# Altium PCB L50T-TEST.PcbDoc (part 1 of 3)
Units mil, origin at the board's own origin, x right, y up, seen from the top; angles counter-clockwise.
Board outline 6860.42 x 9197.04 mil, 2 copper layers (Top Layer, Bottom Layer); 174 components, 146 nets, 565 pads, 293 vias.
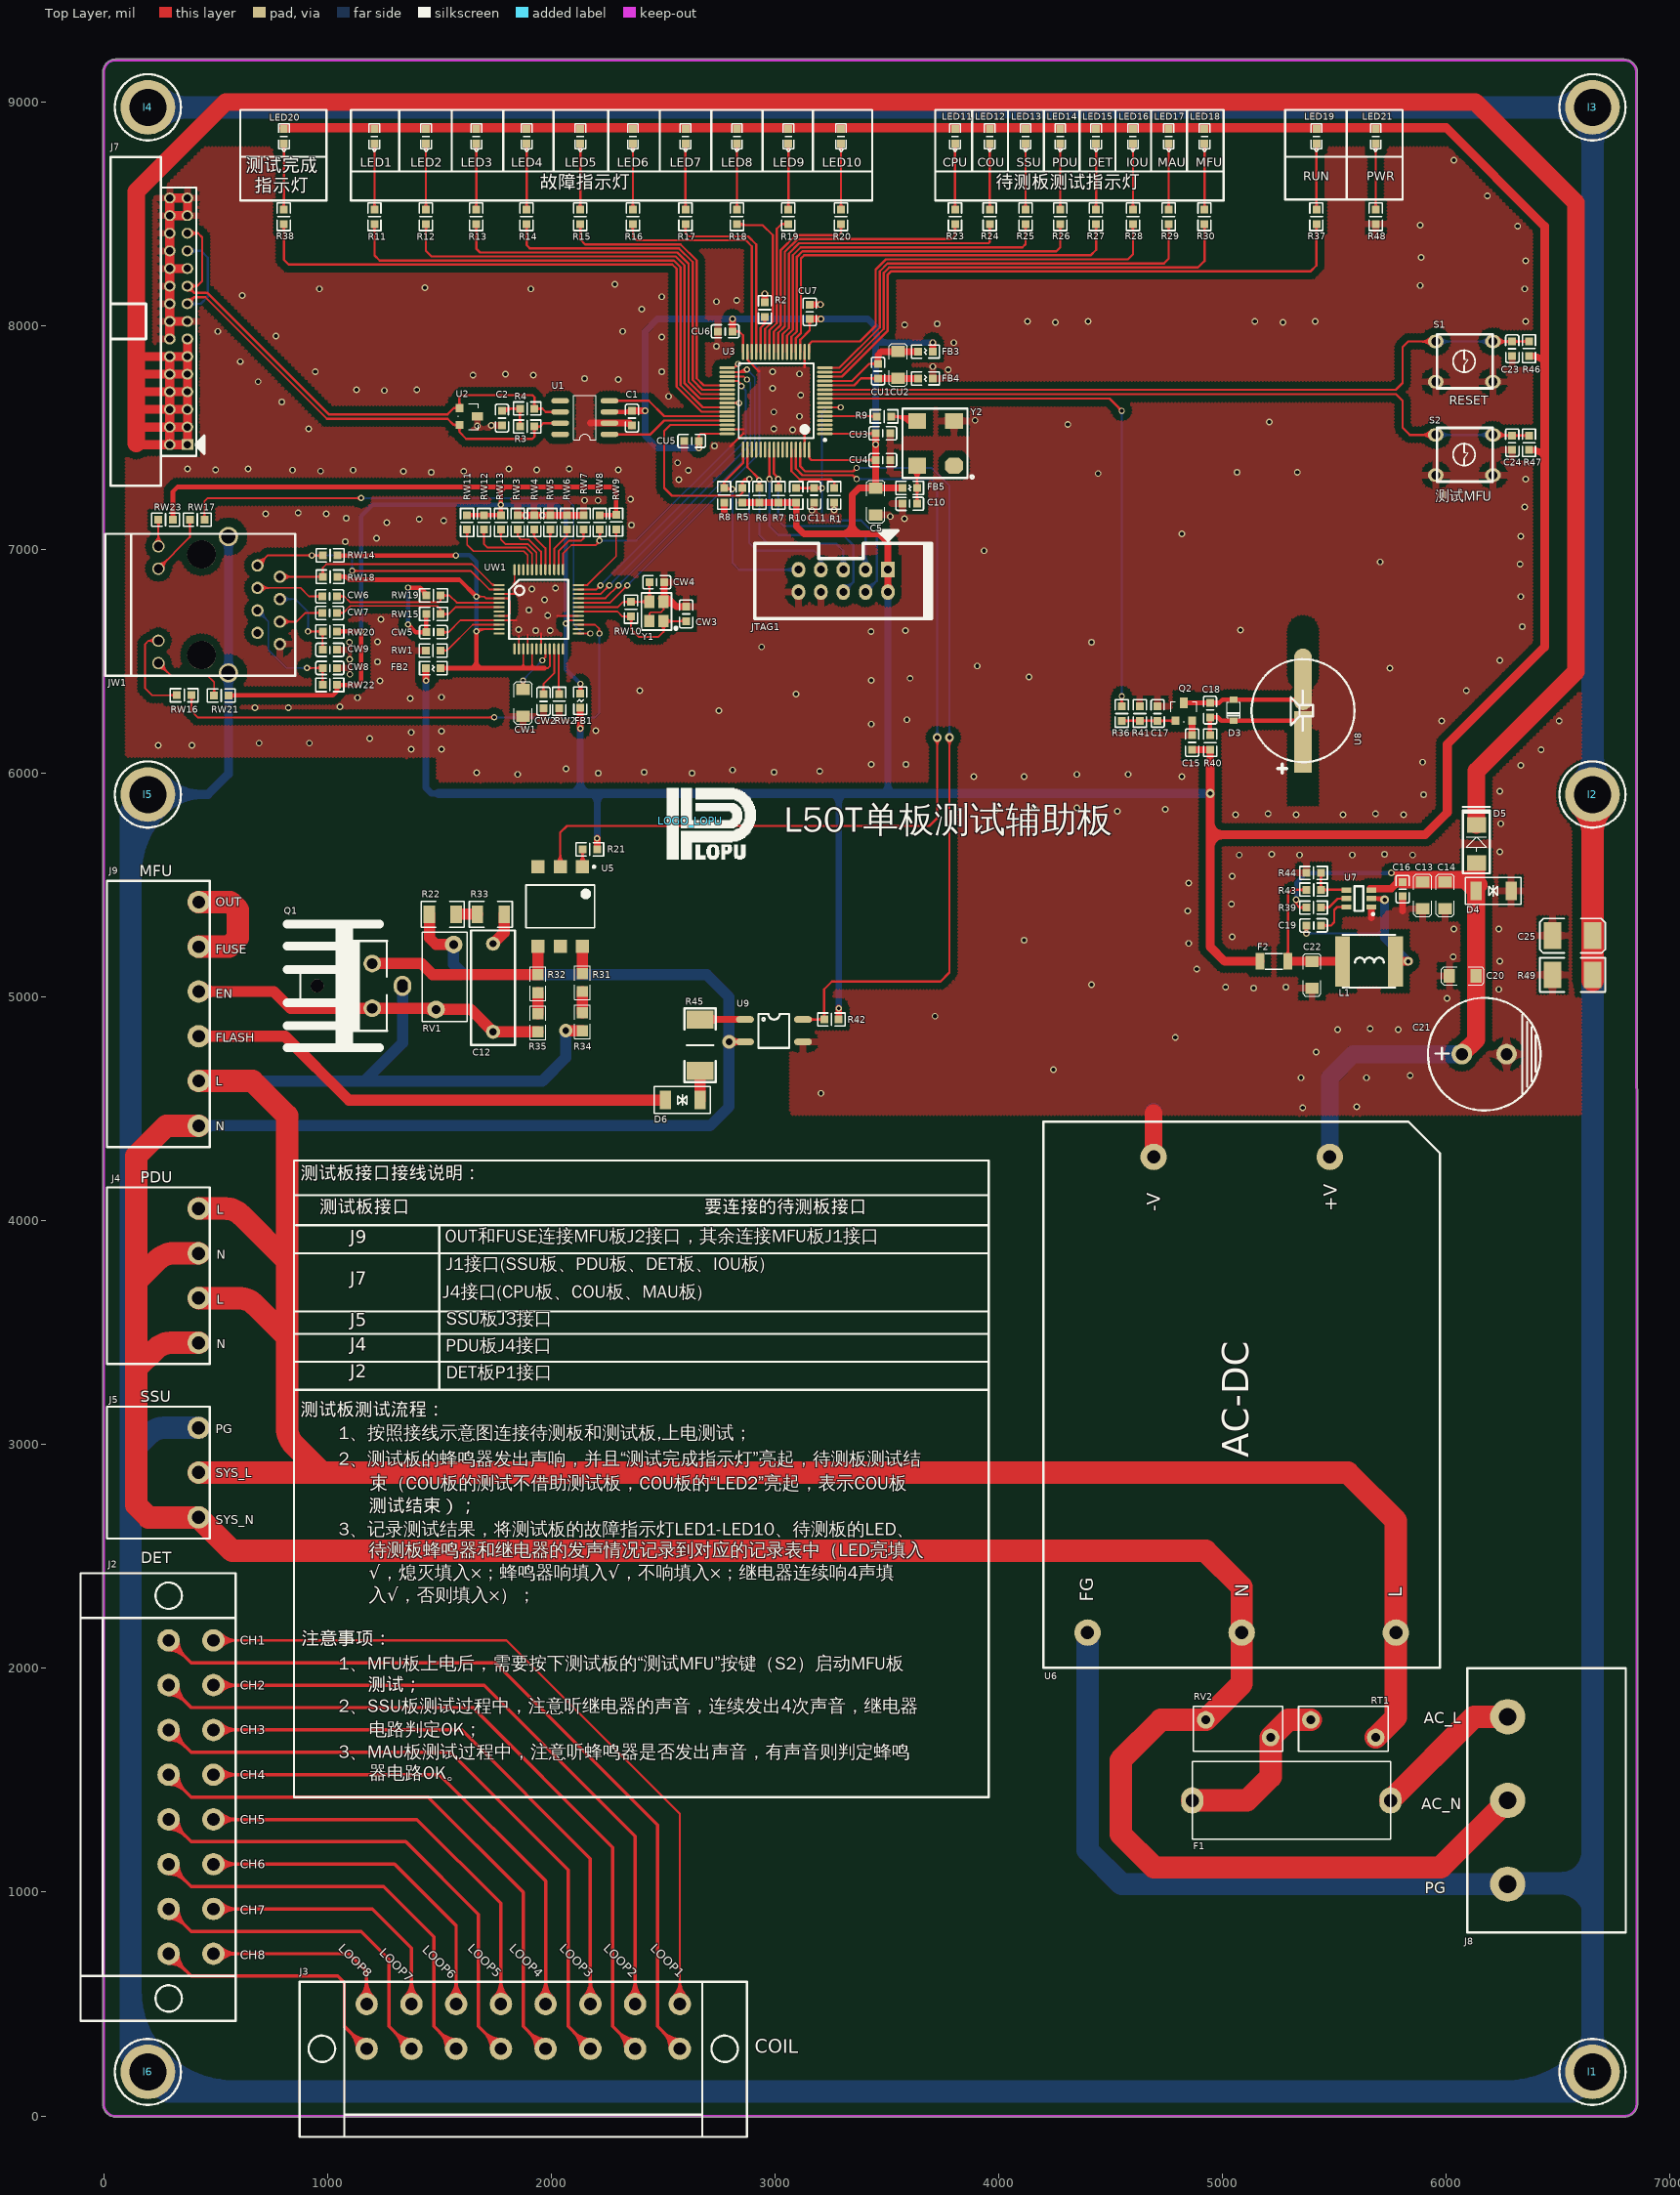
[diagram p0: Top Layer view]
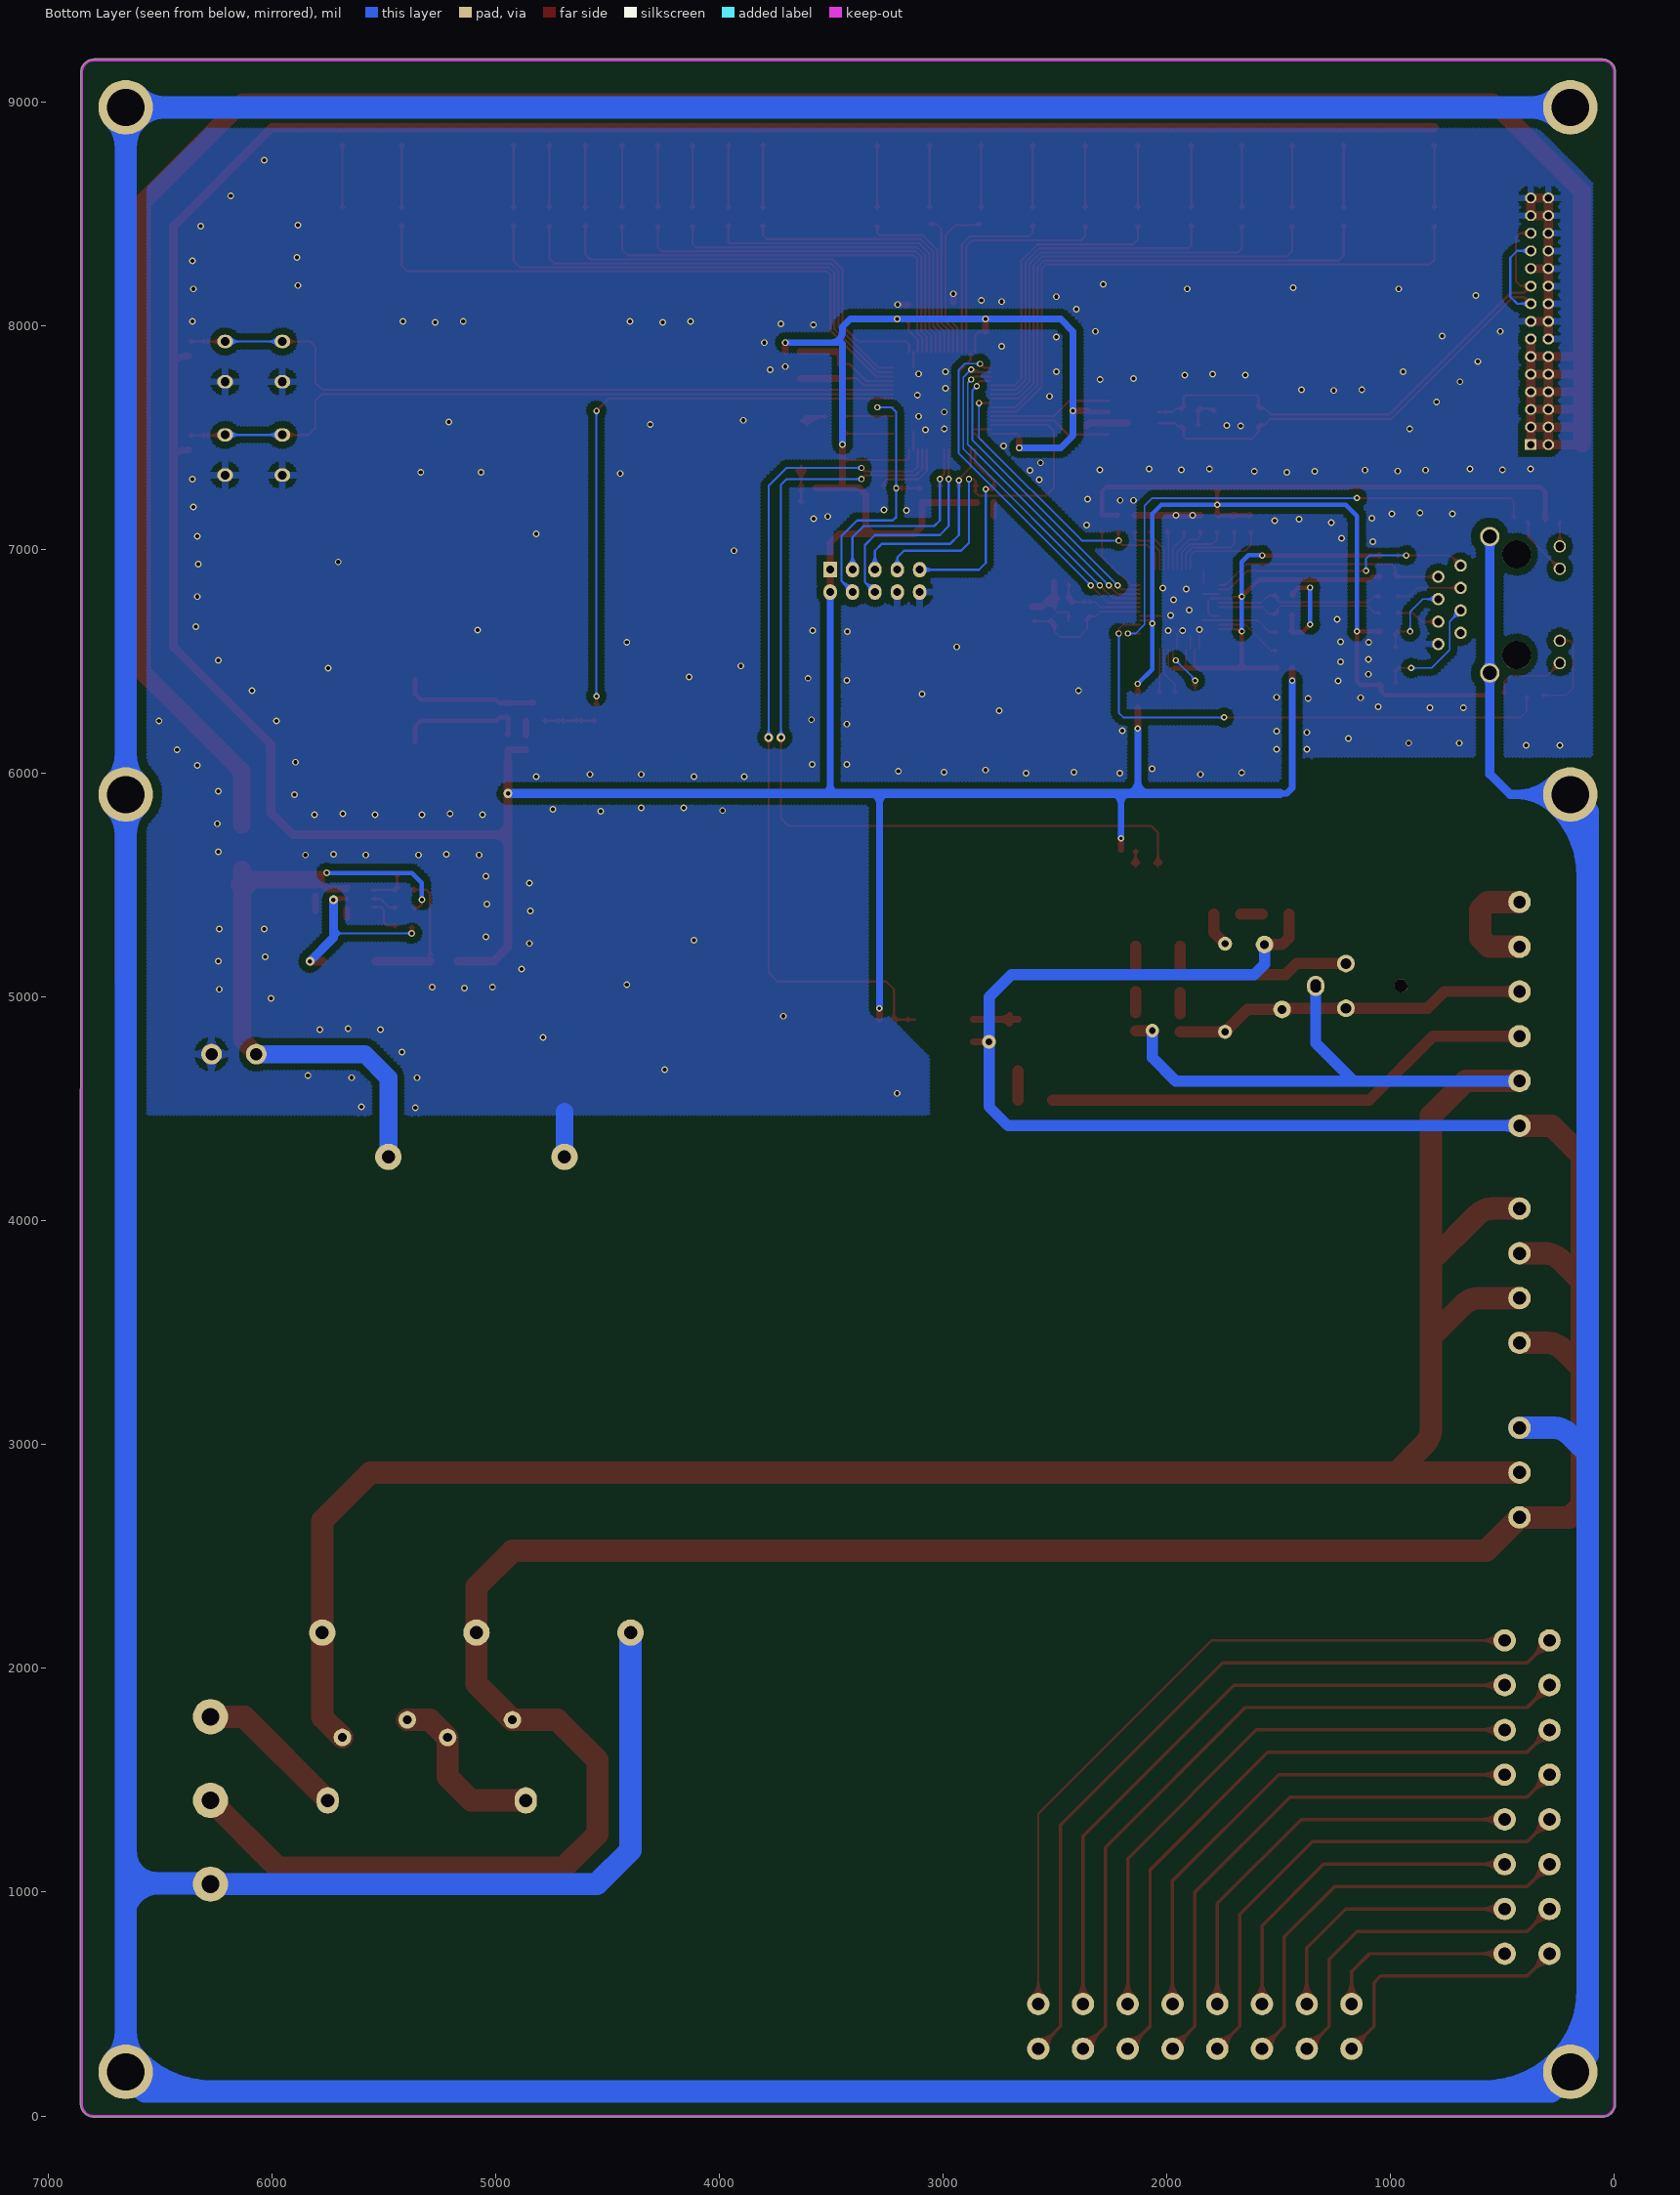
[diagram p1: Bottom Layer view, seen from below]

## Layer stack, top to bottom
Top Layer: signal copper 1.4
Dielectric: dielectric 12.6, FR-4, Dk 4.8
Bottom Layer: signal copper 1.4

## Board outline
-5.02,53.15 cw(c0,53.15) -5.01,53.18 -5.02,53.15 ccw(c53.15,53.15) 53.15,-5.02 6797.24,-5.02 ccw(c6797.24,0) 6798.51,-4.85 ccw(c6797.24,53.3) 6855.22,48.65 ccw(c6850.39,50) 6855.41,50 ccw(c6850.39,50) 6855.41,50 6855.41,53.17 6855.41,53.34 cw(c6850.39,53.3) 6855.41,53.3 cw(c6797.24,53.3) 6855.41,53.17 6855.41,53.34 6855.01,9129.96 ccw(c6794,9131) 6855.02,9131 ccw(c6794,9131) 6795.09,9192.02 ccw(c6795,9187.01) 6795,9192.02 55,9192.02 ccw(c55,9187.01) 54.15,9191.95 ccw(c53.3,9187.01) 53.3,9192.02 ccw(c53.3,9133.86) -4.52,9140.17 ccw(c0,9138) -5.01,9138

## Design rules (kind name [scope] priority, off if disabled: settings)
Clearance Clearance_220 [InNetClass('220') vs InNetClass('220')] p1: gap=100
Clearance Clearance_pg&dgnd [InNet('PG') vs InNet('DGND')] p2: gap=40
Clearance Clearance_POLY [InPolygon] p3: gap=30
Clearance Clearance_MCU [InComponent('U3')] p4: gap=7
Clearance [All] p5: gap=8
ComponentClearance [All] p1 off: gap=10 collisioncheckmode=3 verticalgap=10 showdistances=FALSE
DiffPairsRouting [All] p1: maxlimit=10 minlimit=10 mostfreqgap=10 maxuncoupledlength=500
Height [All] p1: minheight=0 maxheight=2000 prefheight=500
HoleSize [All] p1: absolutevalues=TRUE maxlimit=236.22 minlimit=1 maxpercent=80.000 minpercent=20.000
PolygonConnect PolygonConnect_VIA [IsVia] p1: connectstyle=Direct reliefconductorwidth=10 reliefentries=4 polygonreliefangle="90 Angle"
PolygonConnect [All] p2: connectstyle=Relief reliefconductorwidth=30 reliefentries=4 polygonreliefangle="90 Angle"
RoutingVias [All] p1: holewidth=18 width=30 viastyle="Through Hole" minholewidth=10 minwidth=10 maxholewidth=50 maxwidth=100
SilkToSilkClearance [All] p1 off: silktosilkclearance=10
SilkscreenOverComponentPads SilkToSolderMaskClearance [IsPad] p1: minsilkscreentomaskgap=10
SolderMaskExpansion [All] p1: expansion=4
Width [All] p1: maxlimit=100 minlimit=5 preferedwidth=10
22 further rules are at their usual default settings.

## Classes and differential pairs
differential pair DifferentialPair_RD: +RD+ -RD-
differential pair DifferentialPair_TD: +TD+ -TD-
differential pair DifferentialPair_CAN: +CAN1_H -CAN1_L
differential pair DifferentialPair_STM32-CAN: +CAN_RX -CAN_TX

## Components (designator, comment, footprint, x,y, rotation, side; value= is the part's Value field where it differs from the comment)
C1 "0603-50V-0.1UF-X7R-K" 0603C 2360,7620 r270 top
C2 "DNP" 0603C 1780,7555 r90 top
C5 "1206-16V-10UF-X5R-K" 1206C 3450,7155 r90 top
C10 "0603-50V-0.1UF-X7R-K" 0603c 3635,7205 r180 top
C11 "0603-50V-0.1UF-X7R-K" 0603C 3175,7210 r90 top
C12 "B32671L1222J289" CAP-10-5 1740,5238.7 r270 top
C13 "1206-16V-10UF-X5R-K" 1206C 5895,5395 r90 top locked
C14 "1206-16V-10UF-X5R-K" 1206C 5995,5395 r90 top locked
C15 "0603-50V-0.1UF-X7R-K" 0603C 4864.94,6105 r90 top locked
C16 "0603-50V-0.1UF-X7R-K" 0603C 5805,5515 r270 top locked
C17 "0603-50V-0.1UF-X7R-K" 0603C 4709.94,6300 r270 top locked
C18 "0603-50V-0.1UF-X7R-K" 0603C 4944.94,6250 r90 top locked
C19 "0603-50V-0.1UF-X7R-K" 0603C 5375,5320 r0 top locked
C20 "1206-16V-10UF-X5R-K" 1206C 6134.09,5095 r180 top
C21 "35YXF220MEFC10X125" RB.2/.4 6070,4745 r180 top
C22 "1206-10V-47UF-Y5V-M" 1206C 5400,5040 r90 top locked
C23 "0603-50V-0.1UF-X7R-K" 0603C 6295,7930 r270 top
C24 "0603-50V-0.1UF-X7R-K" 0603C 6295,7510 r270 top
C25 "1812-1NF/2KV" 1812C 6655,5275 r180 top locked
CU1 "0603-50V-0.01UF-X7R-K" 0603C 3460,7830 r270 top locked
CU2 "1206-16V-10UF-X5R-K" 1206C 3550,7885 r270 top locked
CU3 "0603-50V-0.1UF-X7R-K" 0603C 3515,7520 r180 top
CU4 "0603-50V-0.1UF-X7R-K" 0603C 3515,7400 r180 top
CU5 "0603-50V-0.1UF-X7R-K" 0603C 2595,7485 r0 top
CU6 "0603-50V-0.1UF-X7R-K" 0603C 2745,7975 r0 top
CU7 "0603-50V-0.1UF-X7R-K" 0603C 3155,8095 r270 top
CW1 "1206-16V-4.7UF-X5R-K" 1206C 1874,6375 r270 top locked
CW2 "0603-50V-0.01uF-X7R-K" 0603C 1965,6355 r270 top locked
CW3 "0603-50V-18pF-C0G-K" 0603C 2603,6745 r270 top locked
CW4 "0603-50V-18pF-C0G-K" 0603C 2504,6854 r180 top locked
CW5 "10n/0603" 0603C 1441,6631 r0 top locked
CW6 "0603-50V-6.8nF-X7R-K" 0603C 977,6791 r0 top
CW7 "0603-50V-6.8nF-X7R-K" 0603C 977,6717 r0 top
CW8 "0603-10NF" 0603C 978,6471 r0 top
CW9 "0603-22NF" 0603C 978,6552 r0 top
D3 "1N4148" SOD-323 5050,6235 r90 top
D4 "SMBJ15CA" SMB-TVS 6290,5475 r180 top locked
D5 "SS14" SMA 6135,5685 r90 top locked
D6 "SMBJ130CA" SMB-TVS 2665.91,4540 r180 top locked
F1 "T2AH250VP" FUSE-BF013 5750.83,1410 r180 top
F2 "贴片1206/nSMD035（台湾陆海）" 1206F 5230,5160 r180 top
FB1 "0603 31@100MHz" 0603L#1 2130,6325 r90 top
FB2 "0603 31@100MHz" 0603L#2 1440,6470 r0 top
FB3 "0603 31@100MHz" 0603L#2 3705,7885 r180 top locked
FB4 "0603 31@100MHz" 0603L#2 3705,7765 r180 top locked
FB5 "0603 31@100MHz" 0603L#2 3635,7275 r180 top
I1 "PCB-M3" PADS_M3 6653.54,196.85 r0 top locked
I2 "PCB-M3" PADS_M3 6653.54,5905.51 r0 top locked
I3 "PCB-M3" PADS_M3 6653.54,8976.38 r0 top locked
I4 "PCB-M3" PADS_M3 196.85,8976.38 r0 top locked
I5 "PCB-M3" PADS_M3 196.85,5905.51 r0 top locked
I6 "PCB-M3" PADS_M3 196.85,196.85 r0 top locked
J2 "Header 8X2H" KF2EDGKRHM-5.08-8 490,725 r90 top
J3 "Header 8X2H" KF2EDGKRHM-5.08-8 2575,500 r180 top
J4 "Header 4H" CON-4-5.08 424,3455 r90 top locked
J5 "Header 3" CON-3-5.08 424,2675 r90 top locked
J7 "Header15x2" IDC-30-2.0-C 31.22,7335.71 r90 top locked
J8 "Header 3" CON-3-9.5 6093.9,2000.55 r270 top
J9 "Header 6" CON-6-5.08 424,4425 r90 top locked
JTAG1 "Header 5X2" IDC-10-B 3505,6910 r180 top
JW1 "HY911105A" HY911105A 121.54,6753.59 r90 top
L1 "贴片6045功率电感 3.3uH 5A" L-6045 5655,5160 r270 top locked
LED1 "Red" LED-0603 1210,8880 r270 top locked
LED2 "Red" LED-0603 1440,8880 r270 top locked
LED3 "Red" LED-0603 1665,8880 r270 top locked
LED4 "Red" LED-0603 1890,8880 r270 top locked
LED5 "Red" LED-0603 2130,8880 r270 top locked
LED6 "Red" LED-0603 2365,8880 r270 top locked
LED7 "Red" LED-0603 2600,8880 r270 top locked
LED8 "Red" LED-0603 2830,8880 r270 top locked
LED9 "Red" LED-0603 3060,8880 r270 top locked
LED10 "Red" LED-0603 3295,8880 r270 top locked
LED11 "Green" LED-0603 3805,8880 r270 top locked
LED12 "Green" LED-0603 3960,8880 r270 top locked
LED13 "Green" LED-0603 4120,8880 r270 top locked
LED14 "Green" LED-0603 4275,8880 r270 top locked
LED15 "Green" LED-0603 4435,8880 r270 top locked
LED16 "Green" LED-0603 4600,8880 r270 top locked
LED17 "Green" LED-0603 4760,8880 r270 top locked
LED18 "Green" LED-0603 4920,8880 r270 top locked
LED19 "Blue" LED-0603 5420,8880 r270 top locked
LED20 "Yellow" LED-0603 805,8880 r270 top locked
LED21 "Red" LED-0603 5685,8880 r270 top locked
LOGO_LOPU "LOPU_LOGO" LOPU_LOGO 2622,5788.47 r0 top
Q1 "BTA16-600" TO-220AB-C 1200,4950 r90 top locked
Q2 "8050" SOT-23 4864.94,6235 r180 top locked
R1 "0603-10K-1%" 0603R 3265,7275 r270 top
R2 "0603-10K-1%" 0603R 2955,8105 r270 top
R3 "DNP" 0603R 1925,7550 r180 top
R4 "DNP" 0603R 1860,7630 r0 top
R5 "0603-10K-1%" 0603R 2855,7275 r270 top
R6 "0603-10K-1%" 0603R 2930,7275 r270 top
R7 "0603-10K-1%" 0603R 3015,7275 r270 top
R8 "0603-10K-1%" 0603R 2772.72,7210 r90 top
R9 "0603-22-1%" 0603R 3455,7595 r0 top
R10 "0603-10K-1%" 0603R 3095,7275 r270 top
R11 "0603-680-1%" 0603R 1210,8455 r90 top locked
R12 "0603-680-1%" 0603R 1440,8455 r90 top locked
R13 "0603-680-1%" 0603R 1665,8455 r90 top locked
R14 "0603-680-1%" 0603R 1890,8455 r90 top locked
R15 "0603-680-1%" 0603R 2130,8455 r90 top locked
R16 "0603-680-1%" 0603R 2365,8455 r90 top locked
R17 "0603-680-1%" 0603R 2600,8455 r90 top locked
R18 "0603-680-1%" 0603R 2830,8455 r90 top locked
R19 "0603-680-1%" 0603R 3060,8455 r90 top locked
R20 "0603-680-1%" 0603R 3295,8455 r90 top locked
R21 "0603-330-1%" 0603R 2205,5660 r180 top locked
R22 "1210-25.5-1%" 1210R 1455,5370 r0 top
R23 "0603-680-1%" 0603R 3805,8455 r90 top locked
R24 "0603-680-1%" 0603R 3960,8455 r90 top locked
R25 "0603-680-1%" 0603R 4120,8455 r90 top locked
R26 "0603-680-1%" 0603R 4275,8455 r90 top locked
R27 "0603-680-1%" 0603R 4435,8455 r90 top locked
R28 "0603-680-1%" 0603R 4600,8455 r90 top locked
R29 "0603-680-1%" 0603R 4760,8455 r90 top locked
R30 "0603-680-1%" 0603R 4920,8455 r90 top locked
R31 "0805-1.2K-1%" 0805R 2140,5105 r270 top locked
R32 "0805-1.2K-1%" 0805R 1940,5100 r270 top locked
R33 "1210-25.5-1%" 1210R 1670,5370 r0 top
R34 "0805-1.2K-1%" 0805R 2140,4930 r270 top locked
R35 "0805-1.2K-1%" 0805R 1940,4925 r270 top locked
R36 "0603-4.7K-1%" 0603R 4549.94,6300 r270 top locked
R37 "0603-680-1%" 0603R 5420,8455 r90 top locked
R38 "0603-680-1%" 0603R 805,8455 r90 top locked
R39 "0603-10K-1%" 0603R 5440,5400 r180 top
R40 "0603-0-1%" 0603R 4944.94,6170 r270 top locked
R41 "0603-3.3K-1%" 0603R 4629.94,6300 r270 top locked
R42 "0603-3.3K-1%" 0603R 3285,4900 r180 top
R43 "0603-33.2K-1%" 0603R 5375,5480 r0 top locked
R44 "0603-10K-1%" 0603R 5440,5555 r180 top locked
R45 "2512-56K-5% RV" 2512R 2665,4785 r90 top locked
R46 "0603-10K-1%" 0603R 6370,7865 r90 top
R47 "0603-10K-1%" 0603R 6370,7445 r90 top
R48 "0603-680-1%" 0603R 5685,8455 r90 top locked
R49 "1808-1M-1%" 1812R 6421,5175 r270 top locked
RT1 "5D-11" 10D471K 5395,1770 r0 top
RV1 "10D471K" 10D471K 1563.74,5235 r270 top
RV2 "10D471K" 10D471K 4925,1770 r0 top
RW1 "12.4K/1%/0603" 0603R 1505,6549 r180 top locked
RW2 "10K/1%/0603" 0603R 2035,6355 r270 top locked
RW3 "10K/1%/0603" 0603R 1850,7154 r270 top locked
RW4 "10K/1%/0603" 0603R 1923.33,7154 r270 top locked
RW5 "10K/1%/0603" 0603R 1996.67,7154 r270 top locked
RW6 "10K/1%/0603" 0603R 2070,7154 r270 top locked
RW7 "10K/1%/0603" 0603R 2144,7154 r270 top locked
RW8 "10K/1%/0603" 0603R 2217,7089 r90 top locked
RW9 "10K/1%/0603" 0603R 2290,7090 r90 top
RW10 "1M/1%/0603" 0603R 2357,6766 r270 top locked
RW11 "10K/1%/0603" 0603R 1624,7089 r90 top locked
RW12 "10K/1%/0603" 0603R 1699,7089 r90 top locked
RW13 "10K/1%/0603" 0603R 1775,7089 r90 top locked
RW14 "49R9/1%/0603" 0603R 979,6974 r0 top
RW15 "82/1%/0603" 0603R 1441,6712 r0 top locked
RW16 "330 0603 1%" 0603R 327,6349 r0 top
RW17 "330 0603 1%" 0603R 385,7133 r0 top
RW18 "49R9/1%/0603" 0603R 979,6879 r0 top
RW19 "82/1%/0603" 0603R 1441,6795 r0 top locked
RW20 "0603-10-1%" 0603R 1043,6634 r180 top
RW21 "0603-680-1%" 0603R 558,6348 r180 top
RW22 "0603-10-1%" 0603R 1043,6395 r180 top
RW23 "0603-680-1%" 0603R 309,7133 r180 top
S1 "SW-PB" KEY-6*6*7 5953.27,7750 r0 top
S2 "SW-PB" KEY-6*6*7 5953.27,7332.82 r0 top
U1 "SN65HVD232" SO-8 2040,7515 r0 top
U2 "PESD5V0S2BT" SOT-23 1590,7557 r90 top
U3 "STM32F103R8T6" STM-LQFP64_N 3005,7665 r180 top locked
U5 "MOC3063S-TA1" MOC3063 2040,5405 r270 top locked
U6 "LH15-13B12" AC-DC-15W 5971.85,2002.52 r90 top
U7 "TPS563200" TSOT23-6 5610,5440 r0 top locked
U8 "BUZZER" "BUZZ-.28/.46 -SMT" 5360,6140 r90 top
U9 "TLP182(GB" SO-4-2.54 2866,4900 r0 top locked
UW1 "W5500" LQFP-48 1944.17,6733.16 r90 top locked
Y1 "25M贴片无源晶振 3225" OSC3225_4P 2502,6680 r90 top locked
Y2 "HXO-36A8.00000W" XTAL-C 3800.35,7375 r90 top

## Footprints (in the part's own frame and the unit in brackets; to place one, negate y for a bottom-side part, rotate by r counter-clockwise, add the part's x,y. Pads: shape width x height; smd on the part's side, far side on the other; paste and mask are expansions set on the pad)
10D471K [mm]
  round 2 hole 1: 1(0,0) 2(7.366,-2)
  silkscreen extent -1.4,-3.56 8.76,1.52
0603C [mil]
  rect 35x35 smd: 1(0,0) 2(65,0)
  silkscreen extent -29,-29 94,30
0603c [mil]
  rect 35x35 smd: 1(0,0) 2(65,0)
  silkscreen extent -29,-29 94,30
0603L#1 [mil]
  rect 35x35 smd: 1(-32.5,0) 2(32.5,0)
  silkscreen extent -62,-29 62,30, body extent -31,-15 31,16, height 16
0603L#2 [mil]
  rect 35x35 smd: 1(0,0) 2(65,0)
  silkscreen extent -29,-29 94,30
0603R [mil]
  rect 35x35 smd: 1(0,0) 2(65,0)
  silkscreen extent -29,-29 94,30
0805R [mil]
  rect 50x50 smd: 1(0,0) 2(80,0)
  silkscreen extent -35,-35 115,35
1206C [mil]
  rect 50x60 smd: 1(0,0) 2(120,0)
  silkscreen extent -35,-40 155,40
1206F [mm] "Chip Capacitor, 2-Leads, Body 3.25x1.65mm, IPC Medium Density"
  rect 1x1.85 smd: 1(-1.6,0) 2(1.6,0)
  silkscreen extent -1.02,-0.89 1.02,0.89, body extent -1.6,-0.83 1.6,0.83, height 1.43
1210R [mil]
  rect 52x80 smd: 1(0,0) 2(120,0)
  silkscreen extent -36,-58 156,58
1812C [mm]
  rect 2x3 smd: 1(0,0) 2(4.572,0)
  silkscreen extent -1.42,-1.93 5.99,1.97
1812R [mm]
  rect 3x2 smd: 1(1.905,5.944) 2(1.905,1.372)
  silkscreen extent -0.03,-0.05 3.87,7.37
2512R [mil]
  rect 80x120 smd: 1(-115,0) 2(115,0)
  silkscreen extent -165,-70 165,70, body extent -126,-63 126,63, height 24
AC-DC-15W [mm]
  round 3 hole 1.5: 1(4,40) 2(4,22.5) 3(4,5) 4(58,32.5) 8(58,12.5)
  silkscreen extent 0,0 62,45
"BUZZ-.28/.46 -SMT" [mil]
  rect 275.59x80 smd: 1(0,0)
  oval 275.59x80 smd: 2(280,0)
  silkscreen extent -139,-230 370,230
CAP-10-5 [mm]
  round 1.6 hole 0.8: 1(0,0) 2(10,0)
  silkscreen extent -1.5,-2.5 11.5,2.5
CON-3-5.08 [mil]
  round 100 hole 59: 1(0,0) 2(200,0) 3(400,0)
  silkscreen extent -95,-50 495,410
CON-3-9.5 [mm] "栅栏式接线端子"
  round 4 hole 2: 1(5.5,4.6) 2(15,4.6) 3(24.5,4.6)
  silkscreen extent 0,0 30,18
CON-4-5.08 [mil]
  round 100 hole 59: 1(0,0) 2(200,0) 3(400,0) 4(600,0)
  silkscreen extent -95,-50 695,410
CON-6-5.08 [mil]
  round 100 hole 56: 1(0,0) 2(200,0) 3(400,0) 4(600,0) 5(800,0) 6(1000,0)
  silkscreen extent -95,-50 1095,410
FUSE-BF013 [mm]
  oval 2.5x3 hole 1.5: 1(0,0) 2(22.5,0)
  silkscreen extent 0,-4.4 22.5,4.4
HY911105A [mm]
  round 3.25 hole 3.25 unplated: 0(-5.715,-8.013) 0(5.715,-8.013)
  round 1.4 hole 0.89: 1(4.45,-14.363) 2(3.18,-16.903) 3(1.91,-14.363) 4(0.64,-16.903) 5(-0.65,-14.363) 6(-1.92,-16.903) 7(-3.19,-14.363) 8(-4.46,-16.903)
  round 1.4 hole 1.02: 9(6.625,-3.113) 10(4.085,-3.113) 11(-4.085,-3.113) 12(-6.625,-3.113)
  round 2.2 hole 1.63: 13(-7.745,-11.063) 14(7.745,-11.063)
  silkscreen extent -8.05,-18.66 8.05,2.91, body extent -7.94,-18.49 7.94,2.91, height 13.5
IDC-10-B [mil]
  rect 60x70 hole 35: 1(0,0)
  oval 60x70 hole 35: 2(0,100) 3(100,0) 4(100,100) 5(200,0) 6(200,100) 7(300,0) 8(300,100) 9(400,0) 10(400,100)
  silkscreen extent -196,-175 596,218
IDC-30-2.0-C [mm]
  rect 1.219x1.321 hole 0.8: 1(3.38,-8.7)
  oval 1.219x1.321 hole 0.8: 2(3.38,-6.7) 3(5.38,-8.7) 4(5.38,-6.7) 5(7.38,-8.7) 6(7.38,-6.7) 7(9.38,-8.7) 8(9.38,-6.7) 9(11.38,-8.7) 10(11.38,-6.7) 11(13.38,-8.7) 12(13.38,-6.7) 13(15.38,-8.7) 14(15.38,-6.7) 15(17.38,-8.7) 16(17.38,-6.7) 17(19.38,-8.7) 18(19.38,-6.7) 19(21.38,-8.7) 20(21.38,-6.7) 21(23.38,-8.7) 22(23.38,-6.7) 23(25.38,-8.7) 24(25.38,-6.7) 25(27.38,-8.7) 26(27.38,-6.7) 27(29.38,-8.7) 28(29.38,-6.7) 29(31.38,-8.7) 30(31.38,-6.7)
  silkscreen extent -1.27,-10.6 36.03,0.02
KEY-6*6*7 [mil]
  oval 70x60 hole 40: 1(0,0) 1(255.91,0) 2(0,180) 2(255.91,180)
  silkscreen extent 5,-29 255,211
KF2EDGKRHM-5.08-8 [mil]
  round 100 hole 56: 1(0,0) 2(0,200) 3(200,0) 4(200,200) 5(400,0) 6(400,200) 7(600,0) 8(600,200) 9(800,0) 10(800,200) 11(1000,0) 12(1000,200) 13(1200,0) 14(1200,200) 15(1400,0) 16(1400,200)
  silkscreen extent -300,-100 1700,594
L-6045 [mm]
  rect 5.7x1.7 smd: 1(0,3) 2(0,-3)
  Top Layer pour cut-out: -3,-3 -3,3 3,3 3,-3
  silkscreen extent -3,-3 3,3
LED-0603 [mil]
  rect 35x35 smd: 1(0,0) 2(65,0)
  silkscreen extent -23,-24 101,24
LOPU_LOGO [mil]
  silkscreen extent -105,-170 291,146
LQFP-48 [mm]
  rect 0.254x1.27 smd: 1(2.75,4.5)
  oval 0.254x1.27 smd: 2(2.25,4.5) 3(1.75,4.5) 4(1.25,4.5) 5(0.75,4.5) 6(0.25,4.5) 7(-0.25,4.5) 8(-0.75,4.5) 9(-1.25,4.5) 10(-1.75,4.5) 11(-2.25,4.5) 12(-2.75,4.5) 25(-2.75,-4.5) 26(-2.25,-4.5) 27(-1.75,-4.5) 28(-1.25,-4.5) 29(-0.75,-4.5) 30(-0.25,-4.5) 31(0.25,-4.5) 32(0.75,-4.5) 33(1.25,-4.5) 34(1.75,-4.5) 35(2.25,-4.5) 36(2.75,-4.5)
  oval 1.27x0.254 smd: 13(-4.5,2.75) 14(-4.5,2.25) 15(-4.5,1.75) 16(-4.5,1.25) 17(-4.5,0.75) 18(-4.5,0.25) 19(-4.5,-0.25) 20(-4.5,-0.75) 21(-4.5,-1.25) 22(-4.5,-1.75) 23(-4.5,-2.25) 24(-4.5,-2.75) 37(4.5,-2.75) 38(4.5,-2.25) 39(4.5,-1.75) 40(4.5,-1.25) 41(4.5,-0.75) 42(4.5,-0.25) 43(4.5,0.25) 44(4.5,0.75) 45(4.5,1.25) 46(4.5,1.75) 47(4.5,2.25) 48(4.5,2.75)
  silkscreen extent -3.36,-3.36 3.36,3.36
MOC3063 [mm] "SOP, 6-Leads, Body 7.30x6.50mm, Pitch 2.54mm, IPC Medium Density"
  rect 1.5x1.5 smd: 1(-4.5,2.54) 2(-4.5,0) 3(-4.5,-2.54) 4(4.5,-2.54) 5(4.5,0) 6(4.5,2.54)
  silkscreen extent -4.62,-3.9 2.42,3.97, body extent -3.5,-3.9 3.5,3.9, height 2.65
OSC3225_4P [mm]
  rect 1.4x1.15 smd: 1(0,0) 2(2.2,0) 3(2.2,1.6) 4(0,1.6)
  silkscreen extent -1,-1.55 3.2,2.5, body extent -0.5,-0.45 2.7,2.05, height 0.61
PADS_M3 [mm]
  round 6.2 hole 4.22: 1(0,0)
  silkscreen extent -3.75,-3.75 3.75,3.75
RB.2/.4 [mil]
  round 92 hole 54: 1(0,0) 2(-200,0)
  silkscreen extent -352,-252 152,251, body extent -297,-197 97,197, height 791
SMA [mil]
  rect 70x85 smd: 1(-85,0) 2(85,0)
  silkscreen extent -132,-60 165,60
SMB-TVS [mm] "SMBJ*CA"
  rect 1.27x2.1 smd: 1(0,0) 2(3.96,0)
  silkscreen extent -1.14,-1.52 5.21,1.52
SO-4-2.54 [mil]
  oval 80x30 smd: 1(0,0) 2(0,-100) 3(259,-100) 4(259,0)
  silkscreen extent 60,-127 198,25
SO-8 [mil]
  oval 80x24 smd: 1(220,0) 2(220,50) 3(220,100) 4(220,150) 5(0,150) 6(0,100) 7(0,50) 8(0,0)
  silkscreen extent 60,-25 160,175
SOD-323 [mil]
  rect 28x36 smd: 1(95,0) 2(0,0)
  silkscreen extent 12,-30 82,30
SOT-23 [mil]
  rect 36x36 smd: 1(75,0) 2(0,0)
  rect 36x50 smd: 3(38,-80)
  silkscreen extent -20,-85 95,5
STM-LQFP64_N [mm] "Thin QFP, 64-Leads, Body 10x10mm, Pitch 0.5mm, IPC Medium Density"
  oval 1.8x0.3 smd: 1(-5.55,3.75) 2(-5.55,3.25) 3(-5.55,2.75) 4(-5.55,2.25) 5(-5.55,1.75) 6(-5.55,1.25) 7(-5.55,0.75) 8(-5.55,0.25) 9(-5.55,-0.25) 10(-5.55,-0.75) 11(-5.55,-1.25) 12(-5.55,-1.75) 13(-5.55,-2.25) 14(-5.55,-2.75) 15(-5.55,-3.25) 16(-5.55,-3.75) 33(5.55,-3.75) 34(5.55,-3.25) 35(5.55,-2.75) 36(5.55,-2.25) 37(5.55,-1.75) 38(5.55,-1.25) 39(5.55,-0.75) 40(5.55,-0.25) 41(5.55,0.25) 42(5.55,0.75) 43(5.55,1.25) 44(5.55,1.75) 45(5.55,2.25) 46(5.55,2.75) 47(5.55,3.25) 48(5.55,3.75)
  oval 0.3x1.8 smd: 17(-3.75,-5.55) 18(-3.25,-5.55) 19(-2.75,-5.55) 20(-2.25,-5.55) 21(-1.75,-5.55) 22(-1.25,-5.55) 23(-0.75,-5.55) 24(-0.25,-5.55) 25(0.25,-5.55) 26(0.75,-5.55) 27(1.25,-5.55) 28(1.75,-5.55) 29(2.25,-5.55) 30(2.75,-5.55) 31(3.25,-5.55) 32(3.75,-5.55) 49(3.75,5.55) 50(3.25,5.55) 51(2.75,5.55) 52(2.25,5.55) 53(1.75,5.55) 54(1.25,5.55) 55(0.75,5.55) 56(0.25,5.55) 57(-0.25,5.55) 58(-0.75,5.55) 59(-1.25,5.55) 60(-1.75,5.55) 61(-2.25,5.55) 62(-2.75,5.55) 63(-3.25,5.55) 64(-3.75,5.55)
  silkscreen extent -5.68,-4.25 4.25,4.57, body extent -5,-5 5,5, height 1.6
TO-220AB-C [mm]
  round 1.5 hole 1.5: 0(2.54,6.258)
  round 2 hole 1.2: 1(0,0) 3(5.08,0)
  oval 2.3x2 hole 1.2 slot 1.5 at 0 deg: 2(2.54,-3.429)
  silkscreen extent -4.46,-1.65 9.54,9.66
TSOT23-6 [mm]
  rect 1.1x0.6 smd: 1(1.4,-0.95) 2(1.4,0) 3(1.4,0.95) 4(-1.4,0.95) 5(-1.4,0) 6(-1.4,-0.95)
  silkscreen extent -0.5,-1.87 1.73,1.4
XTAL-C [mm]
  oct 1.8x2 smd: 1(0,0)
  rect 1.8x2 smd: 2(5.08,0) 3(5.08,4.2) 4(0,4.2)
  silkscreen extent -1.45,-2.21 6.48,5.84

## Part data
C1 C2 C5 C11 C13 C14 C15 C16 C17 C18 C19 C20 C22 CU1 CU2 CU3 CU4 CU5 CU6 CU7 CW8 CW9: library part Cap, "Capacitor"
C10 C12 C23 C24 C25 CW2 CW3 CW4 CW5 CW6 CW7: library part CAP, "Capacitor"
C21: library part "Cap Pol1", "Polarized Capacitor (Radial)"
CW1: library part Cap, "贴片电容"
D3: library part "Diode 1N4148", "High Conductance Fast Diode"
D4 D6: library part TVSC
D5: library part DIODE, "Diode"
F1 F2: library part "Fuse 1", "Fuse"
FB1 FB2 FB3 FB4 FB5 L1: library part Inductor, "Inductor"
I1 I2 I3 I4 I5 I6: library part PCB-M
J2 J3: "Header, 8-Pin, Dual row, Right Angle"
J4: "Header, 4-Pin, Right Angle"
J5 J8: "Header, 3-Pin"
J9: "Header, 6-Pin"
JTAG1: "Header, 5-Pin, Dual row"
LED1 LED2 LED3 LED4 LED5 LED6 LED7 LED8 LED9 LED10 LED11 LED12 LED13 LED14 LED15 LED16 LED17 LED18 LED19 LED20 LED21: library part LED
LOGO_LOPU: library part "TEST PAD"
Q1: library part TRIAC, "使用黑色散热片,宽15*齿高10*长22mm,孔18mm"
Q2: library part NPN, "NPN Transistor"
R1 R2 R3 R4 R5 R6 R7 R8 R9 R10 R11 R12 R13 R14 R15 R16 R17 R18 R19 R20 R23 R24 R25 R26 R27 R28 R29 R30 R36 R37 R38 R39 R40 R41 R43 R44 R46 R47 R48 R49 RW16 RW17 RW20 RW21 RW22 RW23: library part Res1, "Resistor"
R21 R22 R31 R32 R33 R34 R35 R42 R45: library part "Res Semi", "Semiconductor Resistor"
RT1 RV1 RV2: library part "Fuse Thermal", "Thermal Fuse"
RW1 RW2 RW3 RW4 RW5 RW6 RW7 RW8 RW9 RW11 RW12 RW13 RW14 RW15 RW18 RW19: library part RES1
RW10: library part Res2, "Resistor"
S1 S2: "Switch"
U2: library part NUP2105L, "TVS protect"
U3: "LQFP64"
U5: library part MOC3063S
U6: library part AC-DC-12-10W
U7: library part TPS562200
U8: "TMB12A03"
U9: library part TLP126
Y1: library part OSC5032, "Crystal Oscillator"
Y2: library part osc

## Via types
v1: diameter 30, hole 18, Top Layer to Bottom Layer, tented both sides, 242 vias
v2: diameter 28, hole 16, Top Layer to Bottom Layer, tented both sides, 44 vias
v3: diameter 40, hole 20, Top Layer to Bottom Layer, tented both sides, 5 vias
v4: diameter 60, hole 30, Top Layer to Bottom Layer, tented both sides, 2 vias

## Nets (pads, with @x,y where several pads share a name; then routed paths per layer and width w, separated by ;. In a path a pad name is that pad's centre, name@x,y a point inside that pad or via, vN(x,y) a via of type N, cw(c..) or ccw(c..) an arc to the next point about the centre after c; other vN are vias at no path point)
3V3A: FB2.2 RW14.2 RW18.2 UW1.4 UW1.8 UW1.11 UW1.15 UW1.17 UW1.21 | length 3494.1
  Top Layer w8: v2(1665,6635) 1674.58,6644.58 UW1.11@1767,6644.58 ; v2(1665,6790) 1700,6790 1707.63,6782.37 UW1.4@1767,6782.37 1802.63,6782.37 1815,6770 1815,6715 1803.63,6703.63 UW1.8@1767,6703.63 ; 1855,6470 ccw(c1852.63,6492.63) 1875.24,6490 ; 1875.27,6470.27 1875.27,6489.74 ; UW1.15@1875.27,6555.99 1875.27,6489.99 ; 1910,6470 1914.64,6474.64 1914.64,6489.64 ; UW1.17@1914.64,6555.99 1914.64,6490 ; 1935,6470 cw(c1934.82,6490.18) 1934.64,6470 cw(c1934.82,6490.18) 1914.64,6489.64 ; 1970,6470 1985,6470 1993.38,6478.38 UW1.21@1993.38,6555.99 ; 1689.14,6790 ccw(c1689.14,6765.86) 1672.07,6782.93 cw(c1689.14,6765.86) 1689.14,6790 ; 1689.14,6790 cw(c1689.14,6814.14) 1672.07,6797.07 ccw(c1689.14,6814.14) 1689.14,6790 ; 1875.27,6489.74 cw(c1895.13,6489.87) 1875.27,6489.99 ; 1875.27,6489.74 ccw(c1895.13,6489.87) 1894.99,6470 ccw(c1894.82,6489.82) 1914.64,6489.64 ; 1875.27,6489.74 1875.27,6489.99 ; 1914.64,6489.64 ccw(c1894.82,6489.82) 1914.64,6490 ; 1914.64,6489.64 cw(c1934.82,6490.18) 1914.64,6490 ; 1914.64,6489.64 1914.64,6490 ; v2@1666.41,6633.59 cw(c1692.94,6607.06) 1692.94,6644.58 ccw(c1692.94,6607.06) v2@1666.41,6633.59 ; v2@1672.07,6627.93 cw(c1712.26,6587.74) 1712.26,6644.57 ccw(c1712.26,6587.74) v2@1672.07,6627.93
  Top Layer w20: RW18.2@1044,6879 1081,6879 1095,6865 1590,6865 v2(1665,6790) ; RW14.2@1044,6974 v2(1574,6974) ; FB2.2@1505,6470 1635,6470 ; v2(1665,6635) 1665,6500 ; 1970,6470 1935,6470 1934.64,6470 1910,6470 1895.01,6470 1855,6470 1695,6470 ; 1062.11,6879 ccw(c1062.11,6860.89) 1049.3,6873.7 cw(c1062.11,6860.89) 1062.11,6879 ; 1062.11,6879 cw(c1062.11,6897.11) 1049.3,6884.3 ccw(c1062.11,6897.11) 1062.11,6879 ; 1062.11,6974 ccw(c1062.11,6955.89) 1049.3,6968.7 cw(c1062.11,6955.89) 1062.11,6974 ; 1062.11,6974 cw(c1062.11,6992.11) 1049.3,6979.3 ccw(c1062.11,6992.11) 1062.11,6974 ; 1523.11,6470 ccw(c1523.11,6451.89) 1510.3,6464.7 cw(c1523.11,6451.89) 1523.11,6470 ; 1523.11,6470 cw(c1523.11,6488.11) 1510.3,6475.3 ccw(c1523.11,6488.11) 1523.11,6470 ; 1635,6470 ccw(c1635,6500) 1665,6500 ; 1635,6470 1665,6470 ; 1665,6470 1695,6470 ; 1665,6470 1665,6500 ; 1665,6500 ccw(c1695,6500) 1695,6470
  Bottom Layer w20: v2@1575,6975 1635,6975 1665,6945 v2(1665,6790) v2(1665,6635)
3V3D: FB1.2 RW8.2 RW9.2 RW11.2 RW12.2 RW13.2 RW20.1 RW21.1 RW22.1 RW23.1 UW1.28 | length 6846.9
  Top Layer w8: v2(2065,6670) 2078.94,6683.94 UW1.28@2121.33,6683.94
  Top Layer w20: RW23.1@315,7139 RW23.1@309,7133 309,7259 330,7280 1605,7280 1625,7280 1644.94,7280 ; RW21.1@558,6348 1023,6348 1043,6368 RW22.1@1043,6395 1135,6395 1150,6410 1150,6634 RW20.1@1043,6634 ; RW11.2@1624,7154 RW12.2@1699,7154 RW13.2@1775,7154 v2(1775,7200) 1775,7280 ; 1645,7280 ccw(c1645,7260) 1644.94,7280 ; 1720,7280 ccw(c1719.5,7259.5) 1719,7280 ; 1740,7280 cw(c1742.5,7247.5) 1775,7250 cw(c1805,7250) 1805,7280 ; FB1.2@2130,6357.5 v2(2130,6400) ; RW8.2@2217.09,7154.09 RW8.2@2217,7154 2289,7154 RW9.2@2290,7155 2290,7260 2270,7280 1775,7280 ; 309,7151.11 ccw(c327.11,7151.11) 314.3,7138.3 cw(c327.11,7151.11) 309,7151.11 ; 309,7151.11 cw(c290.89,7151.11) 303.7,7138.3 ccw(c290.89,7151.11) 309,7151.11 ; 576.11,6348 ccw(c576.11,6329.89) 563.3,6342.7 cw(c576.11,6329.89) 576.11,6348 ; 576.11,6348 cw(c576.11,6366.11) 563.3,6353.3 ccw(c576.11,6366.11) 576.11,6348 ; 1043,6376.89 ccw(c1024.89,6376.89) 1037.7,6389.7 cw(c1024.89,6376.89) 1043,6376.89 ; 1043,6376.89 cw(c1061.11,6376.89) RW22.1@1048.3,6389.7 ; 1043,6376.89 cw(c1061.11,6376.89) RW22.1@1048.3,6389.7 ; RW22.1@1048.3,6389.7 cw(c1061.11,6376.89) 1061.11,6395 ; RW22.1@1048.3,6389.7 cw(c1061.11,6376.89) 1061.11,6395 ; 1061.11,6395 cw(c1061.11,6413.11) 1048.3,6400.3 ccw(c1061.11,6413.11) 1061.11,6395 ; 1061.11,6634 ccw(c1061.11,6615.89) 1048.3,6628.7 cw(c1061.11,6615.89) 1061.11,6634 ; 1061.11,6634 cw(c1061.11,6652.11) 1048.3,6639.3 ccw(c1061.11,6652.11) 1061.11,6634 ; 1642.11,7154 ccw(c1642.11,7135.89) 1629.3,7148.7 cw(c1642.11,7135.89) 1642.11,7154 ; 1642.11,7154 cw(c1642.11,7172.11) 1629.3,7159.3 ccw(c1642.11,7172.11) 1642.11,7154 ; 1644.94,7280 1719,7280 ; 1680.89,7154 ccw(c1680.89,7172.11) 1693.7,7159.3 cw(c1680.89,7172.11) 1680.89,7154 ; 1680.89,7154 cw(c1680.89,7135.89) 1693.7,7148.7 ccw(c1680.89,7135.89) 1680.89,7154 ; 1717.11,7154 ccw(c1717.11,7135.89) 1704.3,7148.7 cw(c1717.11,7135.89) 1717.11,7154 ; 1717.11,7154 cw(c1717.11,7172.11) 1704.3,7159.3 ccw(c1717.11,7172.11) 1717.11,7154 ; 1719,7280 1775,7280 ; 1756.89,7154 ccw(c1756.89,7172.11) RW13.2@1769.7,7159.3 ; 1756.89,7154 cw(c1756.89,7135.89) 1769.7,7148.7 ccw(c1756.89,7135.89) 1756.89,7154 ; 1756.89,7154 ccw(c1756.89,7172.11) RW13.2@1769.7,7159.3 ; RW13.2@1769.7,7159.3 ccw(c1756.89,7172.11) 1775,7172.11 ; RW13.2@1769.7,7159.3 ccw(c1756.89,7172.11) 1775,7172.11 ; 1775,7172.11 ccw(c1793.11,7172.11) 1780.3,7159.3 cw(c1793.11,7172.11) 1775,7172.11 ; 2130,6375.61 ccw(c2148.11,6375.61) 2135.3,6362.8 cw(c2148.11,6375.61) 2130,6375.61 ; 2130,6375.61 cw(c2111.89,6375.61) 2124.7,6362.8 ccw(c2111.89,6375.61) 2130,6375.61 ; 2235.11,7154 ccw(c2235.11,7135.89) 2222.3,7148.7 cw(c2235.11,7135.89) 2235.11,7154 ; 2235.11,7154 cw(c2235.11,7172.11) 2222.3,7159.3 ccw(c2235.11,7172.11) 2235.11,7154 ; RW9.2@2284.7,7160.3 ccw(c2271.89,7173.11) 2290,7173.11 ; RW9.2@2284.7,7160.3 cw(c2269.48,7175.52) 2269.48,7154 ccw(c2269.48,7175.52) RW9.2@2284.7,7160.3 ; RW9.2@2284.7,7160.3 ccw(c2271.89,7173.11) 2290,7173.11 ; 2290,7173.11 ccw(c2308.11,7173.11) 2295.3,7160.3 cw(c2308.11,7173.11) 2290,7173.11 ; 1036.5,6361.5 ccw(c1021.77,6376.23) 1037.38,6390.03 cw(c1021.77,6376.23) 1036.5,6361.5
  Bottom Layer w20: v2(1150,6635) 1150,7150 1200,7200 v2(1775,7200) 2025,7200 2065,7160 v2(2065,6670) 2065,6465 v2(2130,6400)
220_L: F1.1 J8.1 | length 679.1
  Top Layer w100: F1.1@5750.83,1410 6124.84,1784.02 J8.1@6275,1784.02
220_N: J4.1 J4.3 J5.1 J8.2 J9.1 R22.1 RV1.1 RV2.1 U6.2 U9.2 | length 15818.4
  Top Layer w30: v4(2795,4800) U9.2@2866,4800 ; v4@2805.61,4789.39 cw(c2831.21,4763.79) 2831.21,4800 cw(c2831.21,4836.21) v4@2805.61,4810.61
  Top Layer w50: R22.1@1455,5370 1455,5265 1485,5235 RV1.1@1563.74,5235
  Top Layer w100: J4.1@424,3455 301.42,3455 ccw(c301.42,3355) 230.71,3425.71 145,3340 ; J4.3@424,3855 311.42,3855 ccw(c311.42,3755) 240.71,3825.71 145,3730 ; J9.1@424,4425 280,4425 145,4290 145,3730 ; J8.2@6275,1410 5975,1110 4695,1110 4545,1260 4545,1590 4725,1770 RV2.1@4925,1770 5086.02,1931.02 U6.2@5086.02,2160 5086.02,2363.98 4925,2525 574,2525 J5.1@424,2675 200,2675 145,2730 145,3340 ; 145,3340 145,3730
  Bottom Layer w50: J9.1@424,4425 2710,4425 2795,4510 v4(2795,4800) 2795,5000 2695,5100 1610,5100 1563.74,5146.26 RV1.1@1563.74,5235 ; 484.36,4425 ccw(c484.36,4364.64) 441.68,4407.32 cw(c484.36,4364.64) 484.36,4425 ; 484.36,4425 cw(c484.36,4485.36) 441.68,4442.68 ccw(c484.36,4485.36) 484.36,4425
AGND: CU1.2 CU2.2 FB4.2 U3.12 | length 549.2
  Top Layer w10: U3.12@3223.5,7733.9 3295,7733.9 ; 3320,7733.9 3295,7733.9 ; CU1.2@3460,7765 3385,7765 3353.9,7733.9 3295,7733.9 ; 3429.82,7765 ccw(c3429.82,7795.18) 3451.16,7773.84 cw(c3429.82,7795.18) 3429.82,7765 ; 3429.82,7765 cw(c3429.82,7734.82) 3451.16,7756.16 ccw(c3429.82,7734.82) 3429.82,7765
  Top Layer w30: CU1.2@3460,7765 CU2.2@3550,7765 FB4.2@3640,7765
Beep: R36.1 U3.9 | length 3037
  Top Layer w10: U3.9@3223.5,7674.84 4495.16,7674.84 v2(4549.94,7620.06) ; R36.1@4549.94,6300 v2(4549.94,6345) ; 4534.57,7635.43 ccw(c4549.94,7650.79) 4549.94,7629.06 cw(c4549.94,7650.79) 4534.57,7635.43 ; 4534.57,7635.43 cw(c4519.21,7620.06) 4540.94,7620.06 ccw(c4519.21,7620.06) 4534.57,7635.43 ; 4549.94,6323.27 ccw(c4528.21,6323.27) 4543.57,6338.64 cw(c4528.21,6323.27) 4549.94,6323.27 ; 4549.94,6323.27 cw(c4571.66,6323.27) 4556.3,6338.64 ccw(c4571.66,6323.27) 4549.94,6323.27 ; 4549.94,6330.18 ccw(c4580.11,6330.18) 4558.78,6308.84 cw(c4580.11,6330.18) 4549.94,6330.18 ; 4549.94,6330.18 cw(c4519.76,6330.18) 4541.1,6308.84 ccw(c4519.76,6330.18) 4549.94,6330.18
  Bottom Layer w10: v2(4549.94,6345) v2(4549.94,7620.06) ; 4549.94,6366.73 ccw(c4571.66,6366.73) 4556.3,6351.36 cw(c4571.66,6366.73) 4549.94,6366.73 ; 4549.94,6366.73 cw(c4528.21,6366.73) 4543.57,6351.36 ccw(c4528.21,6366.73) 4549.94,6366.73 ; 4549.94,7598.34 ccw(c4528.21,7598.34) 4543.57,7613.7 cw(c4528.21,7598.34) 4549.94,7598.34 ; 4549.94,7598.34 cw(c4571.66,7598.34) 4556.3,7613.7 ccw(c4571.66,7598.34) 4549.94,7598.34
CAN1_H: J7.17 J7.23 R3.1 U1.7 U2.2 | length 3294.4
  Top Layer w10: J7.17@373.74,8098.7 403.11,8128.07 ; 1994,7565 U1.7@2040,7565 1965,7565 1950,7550 ; 403.11,8128.07 ccw(c424.77,8106.41) 394.51,8101.65 cw(c424.77,8106.41) 403.11,8128.07 ; 403.11,8128.07 cw(c377.97,8153.21) 376.52,8117.69 ccw(c377.97,8153.21) 403.11,8128.07 ; 403.11,8128.07 453.64,8128.07 997.22,7584.5 1536.5,7584.5 1564,7557 ; 1564,7557 ccw(c1564,7576.5) 1579.6,7564.8 cw(c1564,7576.5) 1564,7557 ; 1564,7557 cw(c1564,7537.5) 1579.6,7549.2 ccw(c1564,7537.5) 1564,7557 ; 1564,7557 U2.2@1590,7557 1590,7525 1620,7495 1915,7495 1925,7505 R3.1@1925,7550 1950,7550 ; 1590,7525.62 ccw(c1558.62,7525.62) 1580.81,7547.81 cw(c1558.62,7525.62) 1590,7525.62 ; 1590,7525.62 cw(c1621.38,7525.62) 1599.19,7547.81 ccw(c1621.38,7525.62) 1590,7525.62 ; 1925,7519.82 ccw(c1894.82,7519.82) 1916.16,7541.16 cw(c1894.82,7519.82) 1925,7519.82 ; 1925,7519.82 cw(c1955.18,7519.82) 1933.84,7541.16 ccw(c1955.18,7519.82) 1925,7519.82 ; 1950,7550 ccw(c1950,7531.25) 1935,7542.5 cw(c1950,7531.25) 1950,7550 ; 1950,7550 cw(c1950,7568.75) 1935,7557.5 ccw(c1950,7568.75) 1950,7550 ; 1995.1,7565 ccw(c1995.1,7581.9) U1.7@2007.05,7569.95 ; 1995.1,7565 cw(c1995.1,7548.1) U1.7@2007.05,7560.05 ; 1995.1,7565 ccw(c1995.1,7581.9) U1.7@2007.05,7569.95 ; 1995.1,7565 cw(c1995.1,7548.1) U1.7@2007.05,7560.05 ; 1995.1,7565 ccw(c1995.1,7581.9) U1.7@2007.05,7569.95 ; 1995.1,7565 cw(c1995.1,7548.1) U1.7@2007.05,7560.05 ; 1995.1,7565 ccw(c1995.1,7581.9) U1.7@2007.05,7569.95 ; 1995.1,7565 cw(c1995.1,7548.1) U1.7@2007.05,7560.05
  Top Layer w15: U2.2@1586.7,7553.7 U2.2@1590,7557
  Bottom Layer w10: J7.17@373.74,8098.7 433.7,8098.7 465,8130 465,8305 435.08,8334.92 J7.23@373.74,8334.92 ; 421.61,8098.7 ccw(c421.61,8052.83) 389.18,8085.27 cw(c421.61,8052.83) 421.61,8098.7 ; 421.61,8098.7 cw(c421.61,8144.57) 389.18,8112.14 ccw(c421.61,8144.57) 421.61,8098.7 ; 421.61,8334.92 ccw(c421.61,8289.05) 389.18,8321.49 cw(c421.61,8289.05) 421.61,8334.92 ; 421.61,8334.92 cw(c421.61,8380.79) 389.18,8348.36 ccw(c421.61,8380.79) 421.61,8334.92
CAN1_L: J7.19 J7.25 R4.2 U1.6 U2.1 | length 3261.4
  Top Layer w10: J7.25@373.74,8413.66 421.34,8413.66 ; U2.1@1589.56,7632.44 1589.56,7679.56 1600,7690 1915,7690 1925,7680 R4.2@1925,7630 1960,7630 1975,7615 U1.6@2040,7615 1994,7615 ; U2.1@1590,7632 1564,7632 ; 402.11,8149.07 ccw(c379.21,8126.17) 377.02,8158.48 cw(c379.21,8126.17) 402.11,8149.07 ; 402.11,8149.07 cw(c421.84,8168.8) 394.41,8173.94 ccw(c421.84,8168.8) 402.11,8149.07 ; 417.44,8177.44 ccw(c417.44,8141.18) 390.08,8164.97 cw(c417.44,8141.18) 417.44,8177.44 ; 417.44,8177.44 cw(c417.44,8213.7) 390.08,8189.91 ccw(c417.44,8213.7) 417.44,8177.44 ; 417.44,8177.44 440,8200 440,8395 421.34,8413.66 ; 417.44,8177.44 J7.19@373.74,8177.44 403.11,8148.07 461.93,8148.07 1005.5,7604.5 1536.5,7604.5 1564,7632 ; 421.34,8413.66 ccw(c421.34,8368.45) 389.23,8400.28 cw(c421.34,8368.45) 421.34,8413.66 ; 421.34,8413.66 cw(c421.34,8458.87) 389.23,8427.04 ccw(c421.34,8458.87) 421.34,8413.66 ; 1564,7632 ccw(c1564,7651.5) 1579.6,7639.8 cw(c1564,7651.5) 1564,7632 ; 1564,7632 cw(c1564,7612.5) 1579.6,7624.2 ccw(c1564,7612.5) 1564,7632 ; 1925,7660.18 ccw(c1955.18,7660.18) R4.2@1933.84,7638.84 ; 1925,7660.18 cw(c1894.82,7660.18) 1916.16,7638.84 ccw(c1894.82,7660.18) 1925,7660.18 ; 1925,7660.18 ccw(c1955.18,7660.18) R4.2@1933.84,7638.84 ; R4.2@1933.84,7638.84 ccw(c1955.18,7660.18) 1955.18,7630 ; R4.2@1933.84,7638.84 ccw(c1955.18,7660.18) 1955.18,7630 ; 1955.18,7630 ccw(c1955.18,7599.82) 1933.84,7621.16 cw(c1955.18,7599.82) 1955.18,7630 ; 1995.1,7615 ccw(c1995.1,7631.9) U1.6@2007.05,7619.95 ; 1995.1,7615 cw(c1995.1,7598.1) U1.6@2007.05,7610.05 ; 1995.1,7615 ccw(c1995.1,7631.9) U1.6@2007.05,7619.95 ; 1995.1,7615 cw(c1995.1,7598.1) U1.6@2007.05,7610.05 ; 1995.1,7615 ccw(c1995.1,7631.9) U1.6@2007.05,7619.95 ; 1995.1,7615 cw(c1995.1,7598.1) U1.6@2007.05,7610.05 ; 1995.1,7615 ccw(c1995.1,7631.9) U1.6@2007.05,7619.95 ; 1995.1,7615 cw(c1995.1,7598.1) U1.6@2007.05,7610.05 ; U2.1@1580.81,7641.19 ccw(c1559.68,7662.32) 1589.56,7662.32 cw(c1559.68,7662.32) U2.1@1580.81,7641.19 ; 1589.56,7664.45 ccw(c1622.45,7664.45) 1599.19,7641.19 cw(c1622.45,7664.45) 1589.56,7664.45
  Top Layer w15: U2.1@1589.56,7632.44 U2.1@1590,7632
CAN_RX: U1.4 U3.44 | length 608
  Top Layer w10: U1.4@2260,7665 2436.42,7665 2505,7596.42 ; 2505,7596.1 U3.44@2786.5,7596.1 ; 2304.9,7665 ccw(c2304.9,7648.1) 2292.95,7660.05 cw(c2304.9,7648.1) 2304.9,7665 ; 2304.9,7665 cw(c2304.9,7681.9) 2292.95,7669.95 ccw(c2304.9,7681.9) 2304.9,7665
CAN_TX: U1.1 U3.45 | length 605
  Top Layer w10: U1.1@2260,7515 2443.58,7515 2505,7576.42 U3.45@2786.5,7576.42 ; 2304.9,7515 ccw(c2304.9,7498.1) 2292.95,7510.05 cw(c2304.9,7498.1) 2304.9,7515 ; 2304.9,7515 cw(c2304.9,7531.9) 2292.95,7519.95 ccw(c2304.9,7531.9) 2304.9,7515
DGND: C1.2 C2.1 C5.1 C10.2 C11.1 C13.1 C14.1 C15.2 C16.2 C17.1 C20.2 C21.2 C22.1 C23.2 C24.2 C25.2 CU3.1 CU4.1 CU5.1 CU6.1 CU7.1 CW1.2 CW2.2 CW3.1 CW4.1 CW5.2 CW8.2 CW9.2 D4.1 FB4.1 J7.14 J7.15 J7.16 J7.18 J7.20 J7.21 J7.22 J7.24 J7.26 J7.27 J7.28 J7.29 J7.30 JTAG1.8 JTAG1.10 JW1.8 Q2.2 R1.2 R2.1 R8.1 R41.1 R44.2 R48.1 R49.2 RW1.2 RW2.2 RW3.1 RW4.1 RW5.1 RW6.1 RW7.1 S1.1 S2.1 U1.2 U2.3 U3.18 U3.31 U3.47 U3.63 U6.4 U7.1 U9.3 UW1.3 UW1.9 UW1.14 UW1.16 UW1.19 UW1.29 UW1.48 Y1.2 Y1.4 Y2.2 | length 4064.7
  Top Layer w8: CW5.2@1506,6631 1541,6631 1593.94,6683.94 UW1.9@1767,6683.94 1843.69,6683.94 ; CW5.2@1515.55,6621.45 cw(c1538.59,6598.41) 1538.59,6631 cw(c1538.59,6663.59) CW5.2@1515.55,6640.55 ; UW1.3@1767,6802.06 1841.63,6802.06 ; 1835.9,6847.87 UW1.48@1835.9,6910.32 ; UW1.14@1855.58,6555.99 1855.58,6615 ; UW1.16@1894.95,6555.99 UW1.16@1894.95,6555.99 1895,6618.48 ; UW1.19@1954.01,6555.99 1954.01,6625 ; 2026.77,6703.63 UW1.29@2121.33,6703.63 ; Y1.4@2431.22,6701.85 ccw(c2425.63,6714.01) 2439.01,6714.01 ; Y1.4@2439.01,6680 2439.01,6714.01 ; Y1.4@2446.8,6701.85 cw(c2452.38,6714.01) 2439.01,6714.01 ; Y1.2@2493.9,6744.91 cw(c2487.67,6732) 2502,6732 ; Y1.2@2502,6766.61 2502,6732 ; Y1.2@2510.1,6744.91 ccw(c2516.33,6732) 2502,6732 ; 2439.01,6714.01 2445,6720 2490,6720 2502,6732
  Top Layer w10: U3.47@2786.5,7537.05 2859.43,7537.05 ; 2800.63,7460.63 2859.38,7519.38 ; U3.31@2877.05,7883.5 2877.05,7847.95 2929.5,7795.5 ; U3.31@2877.95,7853.98 ccw(c2894.68,7853.98) 2882.85,7842.15 ; U3.63@3132.95,7446.5 3132.95,7525 ; 3132.95,7815.82 U3.18@3132.95,7883.5
  Top Layer w30: RW3.1@1850,7154 v1@1884,7154 ; v1(1885,7153) v1@1884,7154 ; v1(1960,7153) v1@1959,7154 ; RW7.1@2144,7154 RW6.1@2070,7154 RW5.1@1996.67,7154 v1@1959,7154 ; 2175,7565 2350,7565 C1.2@2360,7555 ; 2329.82,7565 cw(c2329.82,7524.82) C1.2@2358.23,7553.23 ; Y1.2@2492.12,6781.76 cw(c2506.46,6752.63) 2529.41,6775.59 ; Y1.2@2496.6,6776.94 ccw(c2478.73,6794.8) 2504,6794.8 ; Y1.2@2500.68,6784.02 cw(c2503.2,6741.34) 2533.43,6771.57 ; CW4.1@2504,6854 2504,6768.61 Y1.2@2502,6766.61 2538.39,6766.61 2560,6745 CW3.1@2603,6745 ; Y1.2@2505.37,6754.84 cw(c2526.01,6712.93) 2559.04,6745.96 ; 2772.72,7150 R8.1@2772.72,7210 ; R2.1@2955,8105 v1(2955,8143) ; CU7.1@3155,8095 v1(3203,8095) ; C15.2@4864.94,6170 Q2.2@4864.94,6235 ; 5665.12,5355.12 U7.1@5665.12,5395 ; 5805,5385 C16.2@5805,5450 ; v1@1884,7154 RW4.1@1923.33,7154 v1@1959,7154
  Top Layer w40: J7.14@295,7941.22 J7.16@295,8019.96 ; J7.15@373.74,8019.96 J7.16@295,8019.96 ; J7.21@373.74,8256.18 J7.22@295,8256.18 ; J7.16@295,8019.96 J7.18@295,8098.7 J7.20@295,8177.44 J7.22@295,8256.18 ; J7.22@295,8256.18 J7.24@295,8334.92 J7.26@295,8413.66 J7.28@295,8492.4 ; J7.28@295,8492.4 J7.27@373.74,8492.4 J7.29@373.74,8571.14 J7.30@295,8571.14 J7.28@295,8492.4
  Top Layer w80: U6.4@4692.32,4285.98 4692.32,4480
  Bottom Layer w80: U6.4@4692.32,4285.98 4692.32,4487.32
  other v1: 5359,4505 5600,4510 3205,4570 5351,4640 5644,4640 5839,4650 4245,4675 5419,4755 4789,4820 5515,4855 5785,4855 5660,4859 3715,4915 6004,4995 6235,5035 5139,5041 5014,5045 5284,5045 4414,5055 4885,5125 6239,5160 6031,5180 4849,5240 4114,5255 5044,5270 6035,5305 6235,5305 4845,5385 5040,5415 4849,5510 5044,5540 5075,5635 5345,5635 5580,5635 5850,5635 5220,5639 5725,5639 6240,5650 6244,5775 5059,5815 5329,5815 5539,5815 5809,5815 5204,5819 5684,5819 4530,5830 3986,5834 4744,5840 4160,5845 4350,5845 5899,5905 6240,5920 3889,5985 4114,5985 4819,5985 1850,5995 4350,5995 4579,5995 2210,6000 2630,6000 1666,6003 2416,6005 2996,6005 3200,6010 2810,6015 2066,6020 6334,6035 3430,6040 3585,6040 5895,6050 6424,6105 1374,6108 1509,6108 244,6125 394,6125 694,6135 919,6135 1189,6155 1374,6183 1509,6188 2200,6190 3430,6220 5980,6235 6505,6235 3589,6240 2750,6280 675,6293 825,6293 1055,6298 1369,6335 1134,6338 1510,6340 3094,6355 2395,6370 6090,6370 1235,6413 3430,6415 3604,6425 4135,6430 1100,6443 5749,6470 3904,6480 1224,6498 6240,6505 1099,6510 2940,6565 4414,6585 1098,6586.5 1224,6588 3429,6633 1930,6638 1995,6638 3583,6638 5080,6640 1854,6643 6340,6655 1239,6688 1984,6705 1900,6730 1970,6775 6334,6790 1914,6823 2019,6828 6330,6935 5704,6945 3934,6995 1080,7035 1219,7050 6334,7060 4819,7070 2359,7110 1265,7120 1519,7130 1410,7135 3579,7138 1084,7140 3515,7148 724,7160 994,7160 869,7164 3165,7175 3265,7178 6351,7190 2149,7220 2209,7220 2355,7225 2570.6,7312.29 6355,7315 4444,7340 5065,7345 5335,7345 1464,7346 1339,7350 1609,7350 969,7351 2612.71,7354.4 844,7355 1114,7355 500,7356 1935,7356 2300,7356 375,7360 645,7360 1810,7360 2080,7360 2565,7388 2730,7463 3079,7535 915,7540 2995,7540 1670,7552.5 1732.5,7555 4309,7560 5210,7570 3894,7578 3109,7595 2995,7615 795,7660 2524,7685 3115,7690 1254,7711 1129,7715 1399,7715 2989,7720 690,7750 2299,7760 2149,7765 1650,7780 1920,7780 1795,7784 3109,7785 945,7795 2494,7795 2989,7795 3774,7803 3705,7818 610,7840 2739,7908 3799,7925 2494,7950 769,7955 510,7975 2320,7975 3580,8005 3725,8009 4254,8016 5270,8016 4129,8020 4399,8020 5145,8020 5415,8020 6355,8020 2404,8075 2739,8108 2829,8113 2494,8130 619,8135 964,8165 1909,8165 6351,8165 1435,8170 5884,8180 2284,8185 6355,8290 5888,8305 6319,8445 5884,8450 6184,8580 6034,8740
JTCK: JTAG1.9 R8.2 U3.49 | length 1489.9
  Top Layer w10: U3.49@2857.36,7446.5 2857.36,7387.36 2772.72,7302.72 ; 2772.72,7302.72 ccw(c2797.22,7302.72) 2781,7284.37 cw(c2797.22,7302.72) 2772.72,7302.72 ; 2772.72,7302.72 cw(c2748.23,7302.72) 2764.45,7284.37 ccw(c2748.23,7302.72) 2772.72,7302.72 ; 2772.72,7302.72 R8.2@2772.72,7275 2777.72,7270 v2(2810,7270) ; R8.2@2788.27,7270 ccw(c2788.27,7291.73) 2803.64,7276.36 cw(c2788.27,7291.73) R8.2@2788.27,7270 ; R8.2@2788.27,7270 cw(c2788.27,7248.27) 2803.64,7263.64 ccw(c2788.27,7248.27) R8.2@2788.27,7270 ; v2(2810,7270) cw(c2810,7305.95) 2782.34,7282.98 ccw(c2810,7305.95) v2(2810,7270) ; R8.2@2781.56,7266.16 cw(c2790.83,7256.89) 2790.83,7270 ccw(c2790.83,7256.89) R8.2@2781.56,7266.16
  Bottom Layer w10: v2(2810,7270) 2810,6940 2840,6910 JTAG1.9@3105,6910 ; 2810,7248.27 ccw(c2788.27,7248.27) 2803.64,7263.64 cw(c2788.27,7248.27) 2810,7248.27 ; 2810,7248.27 cw(c2831.73,7248.27) 2816.36,7263.64 ccw(c2831.73,7248.27) 2810,7248.27 ; 3044.64,6910 ccw(c3044.64,6970.36) 3087.32,6927.68 cw(c3044.64,6970.36) 3044.64,6910 ; 3044.64,6910 cw(c3044.64,6849.64) 3087.32,6892.32 ccw(c3044.64,6849.64) 3044.64,6910 ; 3068.79,6910 ccw(c3068.79,6946.21) 3094.39,6920.61 cw(c3068.79,6946.21) 3068.79,6910 ; 3068.79,6910 cw(c3068.79,6873.79) 3094.39,6899.39 ccw(c3068.79,6873.79) 3068.79,6910
JTDI: JTAG1.5 R6.1 U3.50 | length 1520.2
  Top Layer w10: U3.50@2877.05,7446.5 2877.05,7367.95 2930,7315 R6.1@2930,7275 ; R6.1@2930,7288.27 ccw(c2908.27,7288.27) 2923.64,7303.64 cw(c2908.27,7288.27) R6.1@2930,7288.27 ; R6.1@2930,7288.27 cw(c2951.73,7288.27) 2936.36,7303.64 ccw(c2951.73,7288.27) R6.1@2930,7288.27 ; v2@2930,7305.18 ccw(c2960.18,7305.18) 2938.84,7283.84 cw(c2960.18,7305.18) v2@2930,7305.18 ; v2@2930,7305.18 cw(c2899.82,7305.18) 2921.16,7283.84 ccw(c2899.82,7305.18) v2@2930,7305.18 ; 2911.1,7333.9 cw(c2887.2,7310) 2921,7310 ccw(c2887.2,7310) 2911.1,7333.9
  Bottom Layer w10: v2@2930,7315 2930,7065 2970,7025 3275,7025 3305,6995 JTAG1.5@3305,6910 ; 2930,7288.27 ccw(c2908.27,7288.27) 2923.64,7303.64 cw(c2908.27,7288.27) 2930,7288.27 ; 2930,7288.27 cw(c2951.73,7288.27) 2936.36,7303.64 ccw(c2951.73,7288.27) 2930,7288.27 ; 3305,6951.21 ccw(c3341.21,6951.21) 3315.61,6925.61 cw(c3341.21,6951.21) 3305,6951.21 ; 3305,6951.21 cw(c3268.79,6951.21) 3294.39,6925.61 ccw(c3268.79,6951.21) 3305,6951.21 ; 3305,6975.36 ccw(c3365.36,6975.36) 3322.68,6932.68 cw(c3365.36,6975.36) 3305,6975.36 ; 3305,6975.36 cw(c3244.64,6975.36) 3287.32,6932.68 ccw(c3244.64,6975.36) 3305,6975.36
  other v2: 2930,7310
JTDO: JTAG1.6 U3.55 | length 1348.8
  Top Layer w10: v2(2975,7315) 2975.47,7315.47 U3.55@2975.47,7446.5 ; v2@2968.64,7321.36 ccw(c2952.13,7337.87) 2975.47,7337.87 cw(c2952.13,7337.87) v2@2968.64,7321.36 ; 2975.47,7335.59 ccw(c2995.59,7335.59) 2981.36,7321.36 cw(c2995.59,7335.59) 2975.47,7335.59
  Bottom Layer w10: v2(2975,7315) 2975,7105 3015,7065 3305,7065 3350,7020 3350,6855 ; JTAG1.6@3305,6810 3350,6855 ; 2975,7293.27 ccw(c2953.27,7293.27) 2968.64,7308.64 cw(c2953.27,7293.27) 2975,7293.27 ; 2975,7293.27 cw(c2996.73,7293.27) 2981.36,7308.64 ccw(c2996.73,7293.27) 2975,7293.27 ; 3350,6855 cw(c3312.83,6892.16) 3307.52,6839.87 ccw(c3312.83,6892.16) 3350,6855 ; JTAG1.6@3306.51,6829.92 ccw(c3310.09,6865.12) 3335.1,6840.1 cw(c3310.09,6865.12) JTAG1.6@3306.51,6829.92 ; JTAG1.6@3330,6815 cw(c3378.28,6815) 3344.14,6849.14 ccw(c3378.28,6815) JTAG1.6@3330,6815
JTMS: JTAG1.7 R5.1 U3.46 | length 2093.4
  Top Layer w10: U3.46@2786.5,7556.73 2531.73,7556.73 2505,7530 2505,7275.5 2540,7240.5 2840.5,7240.5 2855,7255 ; v2(2885,7315) 2865,7315 ; 2855,7255 ccw(c2845.25,7255) 2849.52,7263.76 cw(c2845.25,7255) 2855,7255 ; 2855,7255 cw(c2864.75,7255) 2860.48,7263.76 ccw(c2864.75,7255) 2855,7255 ; 2855,7255 R5.1@2855,7275 2855,7305 ; 2855,7305 ccw(c2884.75,7305) 2863.8,7283.88 cw(c2884.75,7305) 2855,7305 ; 2855,7305 cw(c2825.25,7305) 2846.2,7283.88 ccw(c2825.25,7305) 2855,7305 ; 2855,7305 2865,7315 ; 2865,7315 ccw(c2865,7332.72) 2878.26,7320.97 cw(c2865,7332.72) 2865,7315 ; 2865,7315 cw(c2865,7297.28) 2878.26,7309.03 ccw(c2865,7297.28) 2865,7315
  Bottom Layer w10: v2(2885,7315) 2885,7030 2920,6995 3175,6995 3205,6965 ; JTAG1.7@3205,6910 3205,6965 ; 2885,7293.27 ccw(c2863.27,7293.27) 2878.64,7308.64 cw(c2863.27,7293.27) 2885,7293.27 ; 2885,7293.27 cw(c2906.73,7293.27) 2891.36,7308.64 ccw(c2906.73,7293.27) 2885,7293.27 ; 3205,6965 ccw(c3242.5,6965) 3220,6935 cw(c3242.5,6965) 3205,6965 ; 3205,6965 cw(c3167.5,6965) 3190,6935 ccw(c3167.5,6965) 3205,6965
JTRST: JTAG1.3 R7.1 U3.56 | length 1518.6
  Top Layer w10: U3.56@2995.16,7446.5 2995.16,7339.84 3015,7320 v2(3015,7315) R7.1@3015,7275 ; 3015,7293.27 ccw(c2993.27,7293.27) 3008.64,7308.64 cw(c2993.27,7293.27) 3015,7293.27 ; 3015,7293.27 cw(c3036.73,7293.27) 3021.36,7308.64 ccw(c3036.73,7293.27) 3015,7293.27 ; v2@3015,7305.18 ccw(c3045.18,7305.18) 3023.84,7283.84 cw(c3045.18,7305.18) v2@3015,7305.18 ; v2@3015,7305.18 cw(c2984.82,7305.18) 3006.16,7283.84 ccw(c2984.82,7305.18) v2@3015,7305.18 ; 2996.1,7338.9 cw(c2972.2,7315) 3006,7315 ccw(c2972.2,7315) 2996.1,7338.9
  Bottom Layer w10: v2(3015,7315) 3015,7130 3040,7105 3355,7105 3405,7055 JTAG1.3@3405,6910 ; 3015,7293.27 ccw(c2993.27,7293.27) 3008.64,7308.64 cw(c2993.27,7293.27) 3015,7293.27 ; 3015,7293.27 cw(c3036.73,7293.27) 3021.36,7308.64 ccw(c3036.73,7293.27) 3015,7293.27 ; 3405,6951.21 ccw(c3441.21,6951.21) 3415.61,6925.61 cw(c3441.21,6951.21) 3405,6951.21 ; 3405,6951.21 cw(c3368.79,6951.21) 3394.39,6925.61 ccw(c3368.79,6951.21) 3405,6951.21 ; 3405,6975.36 ccw(c3465.36,6975.36) 3422.68,6932.68 cw(c3465.36,6975.36) 3405,6975.36 ; 3405,6975.36 cw(c3344.64,6975.36) 3387.32,6932.68 ccw(c3344.64,6975.36) 3405,6975.36
KEY1: C23.1 R46.2 S1.2 U3.11 | length 4827.5
  Top Layer w10: U3.11@3223.5,7714.21 5774.21,7714.21 5805,7745 5805,7905 5830,7930 S1.2@5953.27,7930 ; S1.2@6209.17,7930 C23.1@6295,7930 R46.2@6370,7930 ; 5887.91,7930 ccw(c5887.91,7990.36) 5930.59,7947.68 cw(c5887.91,7990.36) 5887.91,7930 ; 5887.91,7930 cw(c5887.91,7869.64) 5930.59,7912.32 ccw(c5887.91,7869.64) 5887.91,7930 ; 5912.05,7930 ccw(c5912.05,7966.21) 5937.66,7940.61 cw(c5912.05,7966.21) 5912.05,7930 ; 5912.05,7930 cw(c5912.05,7893.79) 5937.66,7919.39 ccw(c5912.05,7893.79) 5912.05,7930 ; 6250.39,7930 ccw(c6250.39,7893.79) 6224.78,7919.39 cw(c6250.39,7893.79) 6250.39,7930 ; 6250.39,7930 cw(c6250.39,7966.21) 6224.78,7940.61 ccw(c6250.39,7966.21) 6250.39,7930 ; 6264.82,7930 ccw(c6264.82,7960.18) 6286.16,7938.84 cw(c6264.82,7960.18) 6264.82,7930 ; 6264.82,7930 cw(c6264.82,7899.82) 6286.16,7921.16 ccw(c6264.82,7899.82) 6264.82,7930 ; 6274.53,7930 ccw(c6274.53,7869.64) 6231.85,7912.32 cw(c6274.53,7869.64) 6274.53,7930 ; 6274.53,7930 cw(c6274.53,7990.36) 6231.85,7947.68 ccw(c6274.53,7990.36) 6274.53,7930 ; 6325.18,7930 ccw(c6325.18,7899.82) 6303.84,7921.16 cw(c6325.18,7899.82) 6325.18,7930 ; 6325.18,7930 cw(c6325.18,7960.18) 6303.84,7938.84 ccw(c6325.18,7960.18) 6325.18,7930 ; 6339.82,7930 ccw(c6339.82,7960.18) 6361.16,7938.84 cw(c6339.82,7960.18) 6339.82,7930 ; 6339.82,7930 cw(c6339.82,7899.82) 6361.16,7921.16 ccw(c6339.82,7899.82) 6339.82,7930
  Bottom Layer w10: S1.2@5953.27,7930 S1.2@6209.17,7930 ; 5994.48,7930 ccw(c5994.48,7893.79) 5968.87,7919.39 cw(c5994.48,7893.79) 5994.48,7930 ; 5994.48,7930 cw(c5994.48,7966.21) 5968.87,7940.61 ccw(c5994.48,7966.21) 5994.48,7930 ; 6018.62,7930 ccw(c6018.62,7869.64) 5975.95,7912.32 cw(c6018.62,7869.64) 6018.62,7930 ; 6018.62,7930 cw(c6018.62,7990.36) 5975.95,7947.68 ccw(c6018.62,7990.36) 6018.62,7930 ; 6143.82,7930 ccw(c6143.82,7990.36) 6186.5,7947.68 cw(c6143.82,7990.36) 6143.82,7930 ; 6143.82,7930 cw(c6143.82,7869.64) 6186.5,7912.32 ccw(c6143.82,7869.64) 6143.82,7930 ; 6167.96,7930 ccw(c6167.96,7966.21) 6193.57,7940.61 cw(c6167.96,7966.21) 6167.96,7930 ; 6167.96,7930 cw(c6167.96,7893.79) 6193.57,7919.39 ccw(c6167.96,7893.79) 6167.96,7930